# Allegro board HMC472A_PCB_Finish.brd
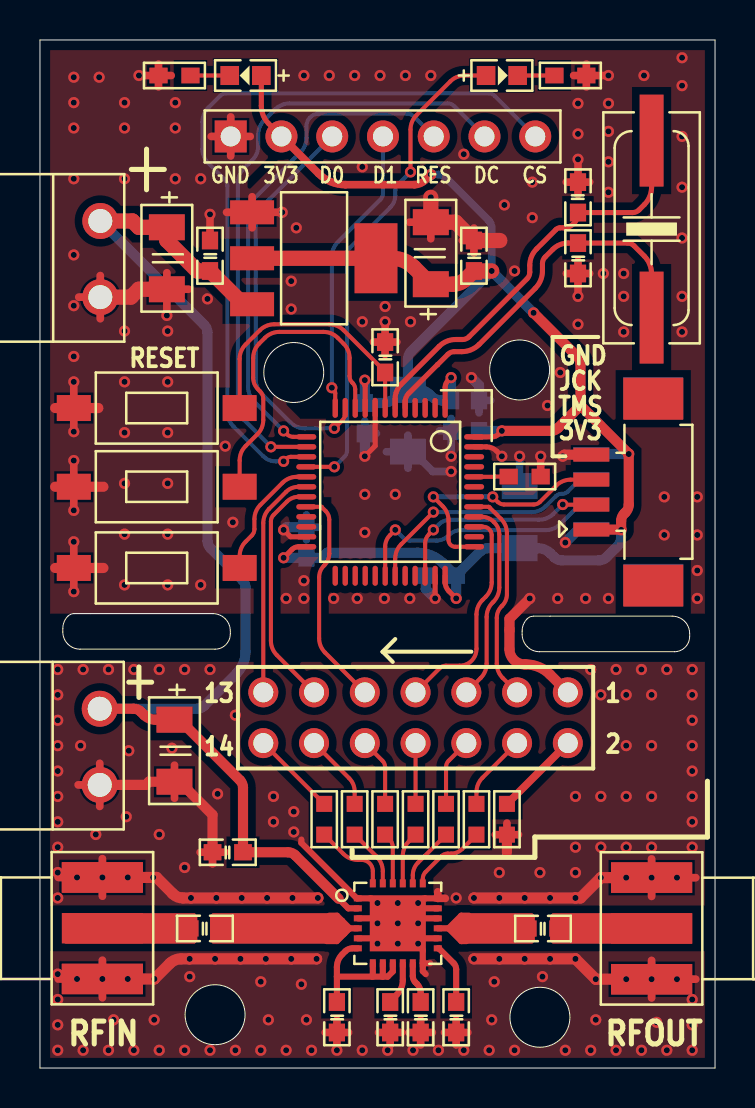
[diagram p0: board, top side]
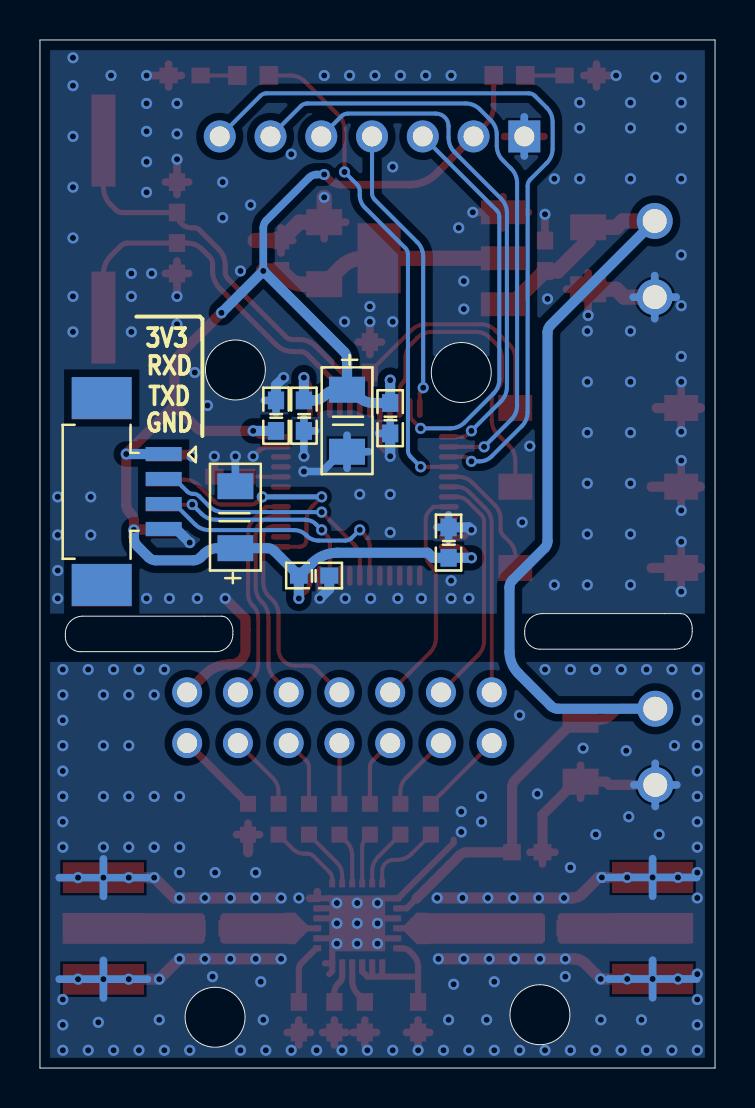
[diagram p1: board, bottom side, seen from below]

Outline 33.78 x 51.44 mm; copper layers: TOP, BOTTOM. Coordinates in mm from the lower left corner of the outline.
Outline path: circle c8.76,2.67 r1.5 ; circle c12.7,34.8 r1.5 ; circle c24,34.92 r1.5 ; circle c25.02,2.54 r1.5 ; 0,51.44 0,0 33.78,0 33.78,51.44 0,51.44 ; 1.14,21.99 arc(1.21,22.32) 1.4,22.61 arc(1.54,22.7) 1.7,22.73 8.66,22.73 arc(8.99,22.67) 9.27,22.48 arc(9.46,22.2) 9.53,21.87 9.53,21.72 arc(9.3,21.18) 8.76,20.95 2.01,20.95 arc(1.68,21.02) 1.4,21.21 arc(1.21,21.49) 1.14,21.82 1.14,21.99 ; 24.13,21.87 arc(24.2,22.2) 24.38,22.48 arc(24.52,22.57) 24.69,22.61 31.64,22.61 arc(31.98,22.54) 32.26,22.35 arc(32.45,22.07) 32.51,21.74 32.51,21.59 arc(32.29,21.05) 31.75,20.83 25,20.83 arc(24.67,20.89) 24.38,21.08 arc(24.2,21.36) 24.13,21.7 24.13,21.87

## Design rules (mm)
net group POWER_CLASS: nets 3V3 5V

## Placement (name value [footprint] x y rotation side)
BNC1  SMA  [BNC5_2R54_7R7_SM_V]  3.12 7 0 top
BNC2  SMA  [BNC5_2R54_7R7_SM_V]  30.61 6.99 180 top
C1  104  [C0603]  8.51 40.64 90 top
C2  104  [C0603]  21.72 40.64 90 top
C3  22uF  [TA3216]  6.35 40.51 270 top
C4  22uF  [TA3216]  19.56 40.77 90 top
C5  106  [TA3216]  6.73 15.88 270 top
C6  104  [C0603]  20.57 32.64 90 bottom
C7  104  [C0603]  17.27 35.56 90 top
C8  1000pF  [C0603]  9.4 10.79 0 top
C9  1uF  [TA3216]  18.41 32.38 270 bottom
C10  104  [C0603]  16.26 32.51 90 bottom
C11  1000pF  [C0603]  25.17 6.98 0 top
C12  1000pF  [C0603]  8.26 6.99 0 top
C13  22pf  [C0603]  26.92 43.56 270 top
C14  104  [C0603]  20.07 24.64 180 bottom
C15  104  [C0603]  13.34 26.29 90 bottom
C16  104  [C0603]  21.97 32.64 90 bottom
C17  10uF  [TA3216]  24 27.56 90 bottom
C18  330pF  [C0603]  20.83 2.54 90 top
C19  22pf  [C0603]  26.92 40.51 90 top
C20  330pF  [C0603]  14.86 2.54 90 top
C21  330pF  [C0603]  17.53 2.54 90 top
C22  330pF  [C0603]  19.05 2.54 90 top
D1  PWR  [LED0603]  10.29 49.66 180 top
D2  LED0  [LED0603]  23.11 49.66 0 top
FB1  200R  [L0603]  14.22 12.45 90 top
FB2  200R  [L0603]  15.75 12.45 90 top
FB3  200R  [L0603]  17.27 12.45 90 top
FB4  200R  [L0603]  18.8 12.45 90 top
FB5  200R  [L0603]  20.32 12.45 90 top
FB6  200R  [L0603]  21.84 12.45 90 top
FB7  200R  [L0603]  23.37 12.45 90 top
J1  JLINK Debug  [1_25_PWT_4P]  30.32 28.88 90 top
J2  CON2  [KF_2EDG_3_81X2]  4.22 44.72 270 top
J3  OLED  [SIP-7]  9.54 46.61 0 top
J4  USART1  [1_25_PWT_4P]  30.32 28.78 270 bottom
J5  CON2  [KF_2EDG_3_81X2]  4.19 20.32 270 top
J6  HEADER 7X2  [CON_2R54_2X7]  26.42 18.8 180 top
NOREF  -  []  0 0 0 top
NOREF#2  -  []  33.78 0 90 top
R1  510R  [R0603]  6.73 49.66 180 top
R2  510R  [R0603]  26.54 49.66 0 top
R3  10K  [R0603]  24.26 29.59 0 top
SW2  RESET  [BUTTON_2P_SMD]  5.84 33.02 0 top
SW3  DOWN  [BUTTON_2P_SMD]  5.84 29.08 0 top
SW4  UP  [BUTTON_2P_SMD]  5.84 25.02 0 top
U1  STM32F103C8T6  [LQFP-48]  17.53 28.83 270 top
U2  AMS1117-3V3  [SOT-223]  13.72 40.51 270 top
U3  HMC472A  [QFN-24]  17.91 7.24 0 top
Y1  8M  [CRY_HC_49U_SMD]  30.61 41.97 90 top

## Library data of the parts
BNC1 BNC2 = BNC
C1 C2 C6-C8 C10-C16 C18-C22 = CAP NP
C3-C5 C9 C17 = CAP POL
D1 D2 = LED
FB1-FB7 = FERRITE_BEAD
J1 J4 = 4 HEADER
J2 J5 = CON2
J3 = HEADER 7
J6 = HEADER 7X2
R1-R3 = R
SW2-SW4 = SW PUSHBUTTON
U1 = STM32F103C8T6_0
U2 = AMS1117-3V3_0
U3 = HMC472A_0
Y1 = CRYSTAL

## Footprints (pads in the part's own frame, mm; a bottom-side part is the same pattern mirrored in y, then rotated)
1_25_PWT_4P
  rect 2.1x3 smd: (-4.742,-0.369) (4.608,-0.369)
  rect 0.7x1.8 smd: 1(-1.94,2.731) 2(-0.694,2.731) 3(0.558,2.731) 4(1.808,2.731)
BNC5_2R54_7R7_SM_V
  rect 4.06x1.52 smd: 1(0,0) 2(0,2.54) 3(0,-2.54) 4(0,2.54) 5(0,-2.54)
BUTTON_2P_SMD
  rect 1.7x1.3 smd: 1(-4.15,0) 2(4.15,0)
C0603
  rect 0.889x0.813 smd: 1(-0.762,0) 2(0.762,0)
CON_2R54_2X7
  round 1.5 hole 1: 1(0,0) 2(0,2.54) 3(2.54,0) 4(2.54,2.54) 5(5.08,0) 6(5.08,2.54) 7(7.62,0) 8(7.62,2.54) 9(10.16,0) 10(10.16,2.54) 11(12.7,0) 12(12.7,2.54) 13(15.24,0) 14(15.24,2.54)
CRY_HC_49U_SMD
  rect 4.6x1.2 smd: 1(-4.428,0) 2(4.428,0)
KF_2EDG_3_81X2
  round 1.8 hole 1.2: 1(2.345,-1.2) 2(6.155,-1.2)
L0603
  rect 0.8x0.8 smd: 1(-0.77,0) 2(0.77,0)
LED0603
  rect 0.93x0.95 smd: 1(-0.79,0) 2(0.79,0)
LQFP-48
  oval 1x0.27 smd: 1(-4.2,2.75) 2(-4.2,2.25) 3(-4.2,1.75) 4(-4.2,1.25) 5(-4.2,0.75) 6(-4.2,0.25) 7(-4.2,-0.25) 8(-4.2,-0.75) 9(-4.2,-1.25) 10(-4.2,-1.75) 11(-4.2,-2.25) 12(-4.2,-2.75) 25(4.2,-2.75) 26(4.2,-2.25) 27(4.2,-1.75) 28(4.2,-1.25) 29(4.2,-0.75) 30(4.2,-0.25) 31(4.2,0.25) 32(4.2,0.75) 33(4.2,1.25) 34(4.2,1.75) 35(4.2,2.25) 36(4.2,2.75)
  oval 0.27x1 smd: 13(-2.75,-4.2) 14(-2.25,-4.2) 15(-1.75,-4.2) 16(-1.25,-4.2) 17(-0.75,-4.2) 18(-0.25,-4.2) 19(0.25,-4.2) 20(0.75,-4.2) 21(1.25,-4.2) 22(1.75,-4.2) 23(2.25,-4.2) 24(2.75,-4.2) 37(2.75,4.2) 38(2.25,4.2) 39(1.75,4.2) 40(1.25,4.2) 41(0.75,4.2) 42(0.25,4.2) 43(-0.25,4.2) 44(-0.75,4.2) 45(-1.25,4.2) 46(-1.75,4.2) 47(-2.25,4.2) 48(-2.75,4.2)
QFN-24
  rect 0.4x0.3 smd: 1(-2,1.25) 2(-2,0.75) 3(-2,0.25) 4(-2,-0.25) 5(-2,-0.75) 6(-2,-1.25) 13(2,-1.25) 14(2,-0.75) 15(2,-0.25) 16(2,0.25) 17(2,0.75) 18(2,1.25)
  rect 0.3x0.4 smd: 7(-1.25,-2) 8(-0.75,-2) 9(-0.25,-2) 10(0.25,-2) 11(0.75,-2) 12(1.25,-2) 19(1.25,2) 20(0.75,2) 21(0.25,2) 22(-0.25,2) 23(-0.75,2) 24(-1.25,2)
  rect 2.8x2.8 smd: 25(0,0)
R0603
  rect 0.914x0.787 smd: 1(-0.8,0) 2(0.8,0)
SIP-7
  rect 1.6x1.6 hole 1: 1(0,0)
  round 1.6 hole 1: 2(2.54,0) 3(5.08,0) 4(7.62,0) 5(10.16,0) 6(12.7,0) 7(15.24,0)
SOT-223
  rect 1.2x2.2 smd: 1(-2.3,-3.1) 2(0,-3.1) 3(2.3,-3.1)
  rect 3.5x2.15 smd: 4(0,3.1)
TA3216
  rect 1.3x1.8 smd: 1(-1.55,0) 2(1.55,0)

## Nets
3V3: C2.1 C4.1 C6.2 C9.1 C10.2 C14.1 C15.1 C16.1 C17.1 D1.1(CATHODE) J1.1 J3.2 J4.1 U1.1(VBAT) U1.9(VDDA) U1.24(VDD_1) U1.36(VDD_2) U1.48(VDD_3) U2.2(OUT0) U2.4(OUT1)
5V: C1.1 C3.1 C5.1 C8.2 J2.1 J5.1 U2.3(IN) U3.2(VDD)
AGND: BNC1.2(GND#2) BNC1.3(GND#3) BNC1.4(GND#4) BNC1.5(GND#5) BNC2.2(GND#2) BNC2.3(GND#3) BNC2.4(GND#4) BNC2.5(GND#5) C5.2 C8.1 C18.1 C20.1 C21.1 C22.1 FB7.1 J5.2 U3.1(NC0) U3.3(NC1) U3.5(NC2) U3.12(NC3) U3.14(NC4) U3.16(NC5) U3.17(NC6) U3.18(NC7) U3.25(GND)
GND: C1.2 C2.2 C3.2 C4.2 C6.1 C7.2 C9.2 C10.1 C13.1 C14.2 C15.2 C16.2 C17.2 C19.1 J1.4 J2.2 J3.1 J4.4 J6.1 R1.2 R2.2 R3.2 SW2.1 SW3.1 SW4.1 U1.8(VSSA) U1.23(VSS_1) U1.35(VSS_2) U1.47(VSS_3) U2.1(GND)
BOOT0: R3.1 U1.44(BOOT0)
CTR0: J6.3 U1.41(PB5)
CTR1: J6.5 U1.40(PB4)
CTR2: J6.7 U1.39(PB3)
CTR3: J6.9 U1.20(PB2/BOOT1)
CTR4: J6.11 U1.19(PB1)
CTR5: J6.13 U1.18(PB0)
KEY1: SW3.2 U1.10(PA0-WKUP)
KEY2: SW4.2 U1.17(PA7)
LED0: D2.1(CATHODE) U1.16(PA6)
NRST: C7.1 SW2.2 U1.7(NRST)
OLED_CS: J3.7 U1.15(PA5)
OLED_D0: J3.3 U1.11(PA1)
OLED_D1: J3.4 U1.12(PA2)
OLED_DC: J3.6 U1.14(PA4)
OLED_RES: J3.5 U1.13(PA3)
SWCLK: J1.3 U1.37(PA14/SWCLK)
SWIO: J1.2 U1.34(PA13/SWIO)
USART1_RXD: J4.2 U1.31(PA10/RXD)
USART1_TXD: J4.3 U1.30(PA9/TXD)
X1: C19.2 U1.5(PD0-OSC_IN) Y1.1
X2: C13.2 U1.6(PD1) Y1.2
N26655: D1.2(ANODE) R1.1
N34017: C12.2 U3.4(RF1)
N34061: BNC1.1 C12.1
N34081: C20.2 U3.6(ACG1) U3.7(AGC2) U3.8(AGC3) U3.9(AGC4)
N34141: C21.2 U3.10(AGC5)
N34189: C22.2 U3.11(AGC6)
N34237: C18.2 U3.13(AGC7)
N34253: C11.1 U3.15(RF2)
N34307: BNC2.1 C11.2
N34347: FB1.1 U3.24(V6)
N34451: FB2.1 U3.23(V5)
N34459: FB3.1 U3.22(V4)
N34467: FB4.1 U3.21(V3)
N34475: FB5.1 U3.20(V2)
N34483: FB6.1 U3.19(V1)
N34491: FB1.2 J6.14
N34527: FB2.2 J6.12
N34539: FB3.2 J6.10
N34543: FB4.2 J6.8
N34555: FB5.2 J6.6
N34567: FB6.2 J6.4
N37032: FB7.2 J6.2
N45168: D2.2(ANODE) R2.1

Pads without a net: U1 2 3 4 21 22 25 26 27 28 29 32 33 38 42 43 45 46

## Via types
v1: diameter 0.559, hole 0.305, TOP to BOTTOM, 286 vias

## Routing (per net, layer and track width the routed paths; a pad name or vN(x,y) marks a point on that pad's centre or on a via; arc(x,y) is an arc through that point)
3V3: length 98
  TOP w0.254: U1.1 20.28,34.06 arc(20.31,34.23) 20.41,34.38 v1(20.57,34.54) ; U1.36 20.28,24.31 arc(20.32,24.07) 20.46,23.86 v1(20.83,23.5) ; v1(23.11,31.88) 22.95,31.71 arc(22.8,31.61) 22.63,31.58 U1.48 ; D1.1 11.08,48.14 arc(11.17,47.66) 11.45,47.25 J3.2 ; v1(12.19,25.53) 12.61,25.94 arc(12.76,26.04) 12.93,26.08 U1.24 ; U1.9 16.28,34.14 16.26,34.16 v1(16.26,34.42)
  TOP w0.381: J3.2 13.94,44.75 arc(14.56,44.34) 15.29,44.2 18.73,44.2 arc(19.03,44.26) 19.28,44.42 v1(19.56,44.7)
  TOP w0.508: 27.05,33.15 29.46,30.73 v1(29.46,30.72) 29.46,28.18 arc(29.42,27.98) 29.31,27.81 29.24,27.74 arc(29.12,27.57) 29.08,27.37 v1(29.08,26.92) 29.07,26.94 J1.1 ; 27.05,33.15 27.05,35.22 arc(27.01,35.42) 26.9,35.58 v1(24.7,37.78) ; 27.05,33.15 25.93,32.03 arc(25.77,31.92) 25.57,31.88 v1(23.11,31.88)
  TOP w0.762: U2.2 U2.4 17.62,40.51 arc(18.21,40.39) 18.72,40.06 C4.1 20.66,39.22 arc(21.03,39.29) 21.33,39.49 C2.1 v1(22.61,39.88)
  BOTTOM w0.381: v1(22.61,39.88) 22.61,42.03 arc(22.57,42.24) 22.45,42.41 20.31,44.55 arc(20.14,44.66) 19.93,44.7 v1(19.56,44.7)
  BOTTOM w0.508: C14.1 20.79,24.64 20.18,25.25 arc(19.59,25.64) 18.89,25.78 14.38,25.78 14.12,25.53 C15.1 v1(12.19,25.53) ; C14.1 22.05,25.86 arc(22.21,25.97) 22.41,26.01 C17.1 24.9,26.01 arc(25.26,25.94) 25.55,25.74 25.74,25.55 arc(25.91,25.44) 26.1,25.4 27.98,25.4 arc(28.18,25.44) 28.34,25.55 28.89,26.1 arc(29.03,26.31) 29.08,26.56 v1(29.08,26.92) ; C14.1 v1(20.83,23.5) ; C9.1 18.93,33.94 arc(19.23,33.88) 19.48,33.7 19.56,33.63 arc(19.81,33.46) 20.11,33.4 C6.2 v1(20.57,34.54) ; C9.1 18.19,33.94 17.82,33.57 arc(17.49,33.35) 17.11,33.27 C10.2 v1(16.26,34.42) ; C9.1 18.41,35.48 arc(18.45,35.67) 18.56,35.84 v1(22.61,39.88) v1(24.7,37.78) ; 21.97,31.88 v1(23.11,31.88) ; J4.1 v1(29.46,30.72)
5V: length 61.9
  TOP w0.305: U3.2 15.43,7.99 14.95,8.47
  TOP w0.508: 14.95,8.47 12.77,10.65 arc(12.61,10.76) 12.41,10.79 C8.2 10.16,14.04 arc(10.12,14.23) 10.01,14.4 6.98,17.43 C5.1 5.79,17.43 arc(5.48,17.49) 5.21,17.66 5.05,17.83 arc(4.88,17.94) 4.69,17.98 J5.1
  TOP w0.762: J2.1 4.63,42.38 4.94,42.06 C3.1 6.35,41.4 7.87,39.88 C1.1 10.17,38.21 U2.3
  BOTTOM w0.508: J5.1 7.86,17.98 arc(8.05,18.01) 8.22,18.12 9.84,19.75 arc(10.17,20.24) 10.29,20.82 10.29,24.05 arc(10.25,24.24) 10.14,24.41 8.53,26.01 arc(8.42,26.18) 8.38,26.37 8.38,36.8 arc(8.34,37) 8.23,37.16 J2.1
AGND: length 135.6
  TOP w0.305: U3.16 18.16,7.49 ; 18.16,7.49 v1(17.91,7.24) ; 18.16,7.49 18.66,7.99 ; v1(17.91,7.24) 17.16,6.49 U3.5 ; v1(17.91,7.24) 17.66,7.49 ; v1(17.91,7.24) 18.66,6.49 ; 18.66,7.99 v1(18.92,8.26) 19.06,8.39 arc(19.17,8.46) 19.29,8.49 U3.18 ; 18.66,7.99 U3.17 ; 17.66,7.49 v1(16.89,8.26) 16.75,8.39 arc(16.65,8.46) 16.52,8.49 U3.1 15.86,8.49 13.08,11.26 13.08,11.43 ; 17.66,7.49 U3.3 ; 18.66,6.49 U3.14 ; 18.66,6.49 v1(18.92,6.22) 19.06,6.08 arc(19.13,5.98) 19.16,5.85 U3.12 ; U3.12 19.16,4.85 19.3,4.7 ; U3.12 19.53,5.24
  TOP w0.381: 14.86,1.16 C20.1 ; C20.1 15.44,1.78 ; C20.1 14.27,1.78 ; C20.1 14.86,2.4 ; 8.64,10.21 C8.1 ; C8.1 8.01,10.79 ; C8.1 9.26,10.79 ; v1(30.61,4.45) 32.81,4.45 ; v1(30.61,4.45) 30.61,5.38 ; v1(30.61,4.45) 30.61,3.51 ; 20.24,1.78 C18.1 ; C18.1 20.83,1.16 ; C18.1 21.41,1.78 ; C18.1 20.83,2.4 ; v1(30.61,9.53) 32.81,9.53 ; v1(30.61,9.53) 30.61,10.46 ; v1(30.61,9.53) 30.61,8.59 ; 18.47,1.78 C22.1 ; C22.1 19.05,2.4 ; C22.1 19.63,1.78 ; C22.1 19.05,1.16 ; 3.12,3.52 v1(3.12,4.46) ; v1(3.12,4.46) 3.12,5.39 ; v1(3.12,4.46) 0.92,4.46 ; 17.53,1.16 C21.1 ; C21.1 18.11,1.78 ; C21.1 17.53,2.4 ; C21.1 16.94,1.78 ; 0.92,9.54 v1(3.12,9.54) ; v1(3.12,9.54) 3.12,10.47 ; v1(3.12,9.54) 3.12,8.6 ; 2.99,13.09 J5.2 ; J5.2 1.91,14.17 ; J5.2 2.99,15.24 ; 20.28,8.49 U3.18 19.91,8.82 ; FB7.1 23.37,12.25 ; FB7.1 23.95,11.68 ; FB7.1 22.79,11.68 ; 6.73,13.5 C5.2 6.73,15.15
  TOP w0.508: C8.1 8.64,12.67 6.98,14.32 C5.2 5.45,14.32 5.29,14.17 J5.2 ; FB7.1 23.37,10.79
  TOP w0.559: v1(13.91,8.51) v1(12.64,8.51) v1(11.37,8.51) v1(10.1,8.51) v1(8.83,8.51) v1(7.56,8.51) 7.15,8.51 arc(6.88,8.56) 6.65,8.72 5.83,9.54 v1(5.66,9.54) v1(4.39,9.54) v1(3.12,9.54) ; v1(21.72,8.51) v1(22.99,8.51) v1(24.26,8.51) v1(25.53,8.51) v1(26.8,8.51) 27.05,8.51 v1(28.07,9.53) v1(29.34,9.53) v1(30.61,9.53) ; v1(21.72,5.46) v1(22.99,5.46) v1(24.26,5.46) v1(25.53,5.46) v1(26.8,5.46) v1(27.81,4.45) v1(29.34,4.45) v1(30.61,4.45) ; v1(13.84,5.46) v1(12.57,5.46) v1(11.3,5.46) v1(10.03,5.46) v1(8.76,5.46) v1(7.49,5.46) 7.06,5.46 arc(6.76,5.4) 6.5,5.23 v1(5.73,4.46) v1(4.39,4.46) v1(3.12,4.46)
  BOTTOM w0.381: 0.92,9.54 v1(3.12,9.54) ; v1(3.12,9.54) 5.33,9.54 ; v1(3.12,9.54) 3.12,10.47 ; v1(3.12,9.54) 3.12,8.6 ; v1(3.12,4.46) 3.12,5.39 ; v1(3.12,4.46) 5.33,4.46 ; v1(3.12,4.46) 0.92,4.46 ; v1(3.12,4.46) 3.12,3.52 ; J5.2 2.99,15.24 ; J5.2 1.91,14.17 ; J5.2 2.99,13.09 ; J5.2 4.07,14.17 ; v1(30.61,4.45) 30.61,5.38 ; v1(30.61,4.45) 28.4,4.45 ; v1(30.61,4.45) 30.61,3.51 ; v1(30.61,4.45) 32.81,4.45 ; 28.4,9.53 v1(30.61,9.53) ; v1(30.61,9.53) 32.81,9.53 ; v1(30.61,9.53) 30.61,10.46 ; v1(30.61,9.53) 30.61,8.59
  vias: v1(0.89,19.94) v1(0.89,18.67) v1(0.89,17.4) v1(0.89,16.13) v1(0.89,14.86) v1(0.89,13.59) v1(0.89,12.32) v1(0.89,11.05) v1(0.89,9.78) v1(0.89,8.51) v1(0.89,4.7) v1(0.89,3.43) v1(0.89,2.16) v1(0.89,0.89) v1(1.85,9.54) v1(1.85,4.46) v1(2.03,16.13) v1(2.16,19.94) v1(2.16,0.89) v1(2.79,11.68) v1(3.43,19.94) v1(3.43,0.89) v1(3.68,2.41) v1(4.32,12.57) v1(4.45,15.88) v1(4.7,19.94) v1(4.7,0.89) v1(5.71,2.41) v1(5.97,19.94) v1(5.97,11.68) v1(5.97,0.89) v1(6.6,16) v1(7.24,19.94) v1(7.24,10.03) v1(7.24,0.89) v1(7.49,4.57) v1(8.51,19.94) v1(8.51,0.89) v1(8.89,13.72) v1(9.78,17.65) v1(9.78,0.89) v1(11.05,4.32) v1(11.05,0.89) v1(11.43,2.41) v1(11.68,13.59) v1(11.68,12.32) v1(12.32,0.89) v1(12.7,12.83) v1(12.7,11.81) v1(13.08,4.19) v1(13.34,2.41) v1(13.59,0.89) v1(14.86,0.89) v1(16.13,0.89) v1(16.89,7.24) v1(16.89,6.22) v1(17.4,0.89) v1(17.91,8.26) v1(17.91,6.22) v1(18.67,0.89) v1(18.92,7.24) v1(19.94,0.89) v1(20.83,8.51) v1(21.21,0.89) v1(22.48,0.89) v1(22.61,2.41) v1(22.73,4.32) v1(22.99,9.78) v1(23.75,0.89) v1(25.02,9.78) v1(25.15,4.57) v1(26.29,0.89) v1(26.8,13.59) v1(26.8,11.05) v1(26.8,9.78) v1(27.56,19.94) v1(27.56,0.89) v1(27.81,2.41) v1(28.07,18.67) v1(28.07,13.59) v1(28.07,11.05) v1(28.83,19.94) v1(28.83,0.89) v1(29.34,18.67) v1(29.34,16.13) v1(29.34,13.59) v1(29.34,11.05) v1(30.1,19.94) v1(30.1,0.89) v1(30.61,18.67) v1(30.61,16.13) v1(30.61,13.59) v1(30.61,11.05) v1(30.86,2.29) v1(31.37,19.94) v1(31.37,0.89) v1(31.88,9.53) v1(31.88,4.45) v1(32.64,19.94) v1(32.64,18.67) v1(32.64,17.4) v1(32.64,16.13) v1(32.64,14.86) v1(32.64,13.59) v1(32.64,12.32) v1(32.64,11.05) v1(32.64,3.43) v1(32.64,2.16) v1(32.64,0.89)
GND: length 99.3
  TOP w0.254: U1.8 16.78,31.13 v1(16.26,30.61) ; v1(12.19,26.92) 12.54,26.58 U1.23 ; U1.47 22.33,31.08 arc(22.62,31.02) 22.86,30.86 v1(23.11,30.61) ; U1.35 v1(19.78,23.5)
  TOP w0.381: 26.34,39.75 C19.1 ; C19.1 v1(26.92,38.61) ; C19.1 27.51,39.75 ; C19.1 26.92,40.37 ; C13.1 27.51,44.32 ; C13.1 26.92,43.7 ; C13.1 26.34,44.32 ; C13.1 v1(26.92,45.47) ; v1(1.69,30.39) SW3.1 v1(1.69,27.9) ; J3.1 10.52,46.61 ; J3.1 9.54,45.63 ; J3.1 9.54,47.59 ; J3.1 8.57,46.61 ; 3.02,37.49 J2.2 ; J2.2 3.02,39.65 ; J2.2 1.94,38.57 ; 19.56,41.49 C4.2 18.48,42.32 ; R2.2 27.34,50.23 ; R2.2 27.34,49.09 ; R2.2 v1(28.45,49.66) ; R2.2 26.71,49.66 ; 21.13,41.4 C2.2 ; C2.2 21.72,40.78 ; C2.2 21.72,42.02 ; U2.1 10.62,43.59 ; U2.1 10.62,42.04 ; U2.1 v1(12.12,42.81) ; U2.1 9.34,42.81 ; C3.2 7.43,38.96 ; C3.2 6.35,39.79 ; C3.2 v1(6.35,37.65) ; R3.2 v1(25.06,30.61) ; R1.2 6.57,49.66 ; R1.2 v1(4.95,49.66) ; R1.2 5.93,49.09 ; R1.2 5.93,50.23 ; C7.2 17.86,36.32 ; C7.2 16.69,36.32 ; C7.2 v1(17.27,37.34) ; C7.2 17.27,35.7 ; v1(1.69,26.33) SW4.1 v1(1.69,23.84) ; v1(1.69,34.33) SW2.1 v1(1.69,31.84) ; C1.2 v1(8.51,42.71)
  TOP w0.508: 0.76,33.02 SW2.1 2.92,33.02 ; v1(26.16,30.61) 26.24,30.69 J1.4 ; 3.17,29.08 SW3.1 0.76,29.08 ; 3.17,25.02 SW4.1 0.76,25.02 ; v1(24.51,23.5) 23.5,22.48 23.5,21.98 23.5,21.87 23.5,20.96 arc(23.72,20.42) 24.26,20.19 24.31,20.19 arc(24.96,20.06) 25.52,19.69 J6.1
  TOP w0.762: v1(19.56,43.56) C4.2 20.8,42.32 C2.2 23.01,41.4 ; C3.2 4.94,38.96 4.55,38.57 J2.2
  BOTTOM w0.381: 13.34,26.43 C15.2 ; C15.2 13.92,27.05 ; C15.2 13.34,27.67 ; 20.57,31.88 20.57,32.5 ; 20.57,31.88 v1(20.57,30.61) ; 20.57,31.88 19.99,31.88 ; 3.02,37.49 J2.2 ; J2.2 1.94,38.57 ; J2.2 3.02,39.65 ; J2.2 4.1,38.57 ; C17.2 v1(24,30.61) ; 21.97,32.78 C16.2 22.56,33.4 ; 9.54,47.59 J3.1 9.54,45.63 ; 18.41,30.01 C9.2 ; C9.2 17.34,30.83 ; C9.2 18.41,31.66 ; C9.2 18.67,30.83 19.65,29.84 v1(20.57,29.84) ; 16.26,32.37 C10.1 16.84,31.75
  BOTTOM w0.508: v1(26.29,26.29) 26.97,26.97 J4.4 ; C15.2 12.32,27.05 v1(12.19,26.92) ; C16.2 21.97,34.16 v1(21.59,34.54) ; v1(19.78,23.5) 19.3,23.97 C14.2 ; C10.1 v1(16.26,30.61)
  vias: v1(1.69,49.57) v1(1.69,48.3) v1(1.69,47.03) v1(1.69,44.49) v1(1.69,40.68) v1(1.69,38.14) v1(1.69,35.6) v1(2.96,49.57) v1(4.23,48.3) v1(4.23,47.03) v1(4.23,44.49) v1(4.23,36.87) v1(4.23,34.33) v1(4.23,31.79) v1(4.23,29.25) v1(4.23,26.71) v1(4.23,24.17) v1(6.39,36.87) v1(6.39,34.33) v1(6.39,31.79) v1(6.39,29.25) v1(6.39,26.71) v1(6.39,24.17) v1(6.77,48.3) v1(6.77,47.03) v1(6.77,44.49) v1(8.04,44.49) v1(8.04,24.17) v1(8.38,38.48) v1(9.27,31.11) v1(9.65,27.3) v1(12.32,23.5) v1(12.57,39.37) v1(12.57,37.97) v1(12.83,42.04) v1(13.21,49.66) v1(13.21,24.38) v1(13.21,23.5) v1(14.48,49.66) v1(14.7,23.5) v1(15.75,49.66) v1(15.88,23.5) v1(16.13,45.09) v1(16.13,37.34) v1(16.26,28.7) v1(16.26,26.8) v1(17.02,49.66) v1(17.24,23.5) v1(17.27,38.1) v1(17.78,28.7) v1(18.29,49.66) v1(18.54,37.34) v1(18.51,23.5) v1(19.56,49.66) v1(21.21,45.72) v1(23.24,43.18) v1(23.75,39.88) v1(24.64,44.32) v1(24.64,42.55) v1(25.4,33.15) v1(25.91,23.5) v1(26.04,34.8) v1(26.92,48.26) v1(26.92,46.74) v1(26.92,37.21) v1(27.3,23.5) v1(28.19,39.75) v1(28.45,48.26) v1(28.45,46.86) v1(28.45,45.34) v1(28.45,43.81) v1(28.45,23.5) v1(29.21,39.75) v1(29.21,38.61) v1(29.21,36.83) v1(30.23,49.66) v1(31.24,28.57) v1(31.24,26.67) v1(32.13,50.55) v1(32.13,49.15) v1(32.13,46.61) v1(32.13,44.07) v1(32.13,41.53) v1(32.13,38.61) v1(32.13,36.83) v1(32.89,28.57) v1(32.89,26.67) v1(32.89,24.89) v1(32.89,23.5)
BOOT0: length 1.7
  TOP w0.203: U1.44 22.73,29.58 22.74,29.59 R3.1
CTR0: length 10.9
  TOP w0.203: U1.41 22.45,28.08 22.49,28.04 22.5,28.04 23.07,27.48 arc(23.29,27.15) 23.37,26.76 23.37,23.71 arc(23.31,23.39) 23.13,23.13 23.1,23.1 arc(22.92,22.83) 22.86,22.52 22.86,20.23 arc(22.94,19.84) 23.16,19.51 J6.3
CTR1: length 10.2
  TOP w0.203: J6.5 22.05,19.51 arc(22.27,19.84) 22.35,20.23 22.35,22.57 arc(22.43,22.95) 22.65,23.28 22.69,23.32 arc(22.91,23.65) 22.99,24.04 22.99,26.69 arc(22.92,27.02) 22.74,27.3 22.7,27.34 arc(22.43,27.52) 22.11,27.58 U1.40
CTR2: length 11.1
  TOP w0.203: J6.7 20,20 arc(20.14,20.1) 20.31,20.13 21.01,20.13 arc(21.6,20.37) 21.84,20.97 21.84,22.69 arc(21.92,23.08) 22.14,23.41 22.31,23.58 arc(22.53,23.91) 22.61,24.3 22.61,26.66 arc(22.48,26.96) 22.19,27.08 U1.39
CTR3: length 11.2
  TOP w0.203: U1.20 14.1,28.08 14.1,28.07 14.3,27.86 arc(14.43,27.67) 14.48,27.44 14.48,25.74 arc(14.42,25.43) 14.24,25.16 14.21,25.13 arc(14.03,24.87) 13.97,24.55 13.97,21.5 arc(14.05,21.11) 14.27,20.78 J6.9
CTR4: length 11.7
  TOP w0.203: J6.11 11.85,20.66 arc(11.63,20.99) 11.56,21.38 11.56,27.35 arc(11.59,27.52) 11.69,27.67 12.35,28.34 arc(12.62,28.52) 12.94,28.58 U1.19
CTR5: length 11.5
  TOP w0.203: U1.18 12.93,29.08 arc(12.6,29.01) 12.32,28.83 11.47,27.98 arc(11.25,27.65) 11.18,27.27 J6.13
KEY1: length 15.8
  TOP w0.203: SW3.2 9.99,30.4 arc(10.07,30.79) 10.29,31.12 10.88,31.71 arc(11.1,32.04) 11.18,32.42 11.18,33.48 arc(11.14,33.68) 11.02,33.85 10.91,33.96 arc(10.73,34.23) 10.67,34.54 10.67,35.52 arc(10.75,35.91) 10.97,36.24 11.26,36.53 arc(11.59,36.75) 11.98,36.83 14.18,36.83 arc(14.57,36.75) 14.9,36.53 15.2,36.24 arc(15.42,35.91) 15.49,35.52 15.49,34.6 arc(15.53,34.44) 15.62,34.3 15.65,34.27 arc(15.74,34.13) 15.78,33.96 U1.10
KEY2: length 6.3
  TOP w0.203: U1.17 12.85,29.58 arc(12.47,29.5) 12.14,29.28 11.03,28.17 arc(10.81,27.84) 10.73,27.46 10.73,26.96 arc(10.7,26.79) 10.6,26.64 10.29,26.33 arc(10.07,26) 9.99,25.61 SW4.2
LED0: length 24.8
  TOP w0.203: D2.1 21.25,49.66 arc(20.86,49.58) 20.53,49.36 18.84,47.67 arc(18.62,47.34) 18.54,46.95 v1(18.54,44.83) ; v1(14.73,30.08) U1.16
  BOTTOM w0.203: v1(18.54,44.83) 17.91,44.2 arc(17.81,44.05) 17.78,43.88 17.78,43.67 arc(17.71,43.33) 17.52,43.05 15.5,41.02 arc(15.4,40.88) 15.37,40.71 15.37,30.9 arc(15.33,30.73) 15.24,30.58 v1(14.73,30.08)
NRST: length 13.4
  TOP w0.203: SW2.2 9.99,35.48 arc(10.07,35.87) 10.29,36.2 11.01,36.91 arc(11.34,37.13) 11.72,37.21 14.48,37.21 arc(14.87,37.13) 15.19,36.91 17.27,34.84 C7.1 17.27,34.12 17.28,34.12 U1.7
OLED_CS: length 38.5
  TOP w0.203: U1.15 12.56,30.58 arc(12.43,30.55) 12.32,30.48 v1(12.19,30.35)
  BOTTOM w0.203: v1(12.19,30.35) 11.79,30.35 arc(11.46,30.42) 11.17,30.61 9.68,32.11 arc(9.46,32.44) 9.38,32.83 9.38,44.14 arc(9.34,44.31) 9.25,44.45 8.43,45.28 arc(8.21,45.61) 8.13,45.99 8.13,47.33 arc(8.21,47.72) 8.43,48.05 9.01,48.64 arc(9.16,48.73) 9.33,48.77 22.44,48.77 arc(22.61,48.73) 22.76,48.64 J3.7
OLED_D0: length 20.1
  TOP w0.203: v1(14.73,32) 15.12,32.39 arc(15.24,32.56) 15.28,32.77 U1.11
  BOTTOM w0.203: v1(14.73,32) 13.25,32 arc(12.86,32.08) 12.53,32.3 11.09,33.74 arc(10.87,34.07) 10.79,34.46 10.79,42.59 arc(10.83,42.76) 10.93,42.91 J3.3
OLED_D1: length 14.6
  TOP w0.203: v1(14.61,34.04) 14.7,33.94 arc(14.76,33.86) 14.78,33.76 U1.12
  BOTTOM w0.203: v1(14.61,34.04) 14.61,40.6 arc(14.68,40.99) 14.9,41.32 17.03,43.45 arc(17.13,43.6) 17.16,43.77 J3.4
OLED_DC: length 31.2
  TOP w0.203: v1(11.56,31.08) U1.14
  BOTTOM w0.203: v1(11.56,31.08) 10.2,32.43 arc(9.98,32.76) 9.91,33.15 9.91,44.28 arc(9.98,44.67) 10.2,45 10.62,45.42 arc(10.84,45.75) 10.92,46.14 10.92,46.7 arc(11,47.08) 11.22,47.41 11.77,47.96 arc(12.1,48.18) 12.49,48.26 20.41,48.26 arc(20.58,48.23) 20.72,48.13 J3.6
OLED_RES: length 25.5
  TOP w0.203: U1.13 12.68,31.58 arc(12.5,31.61) 12.36,31.71 v1(12.19,31.88)
  BOTTOM w0.203: v1(12.19,31.88) 10.71,33.36 arc(10.49,33.69) 10.41,34.08 10.41,42.78 arc(10.49,43.17) 10.71,43.5 13.04,45.82 arc(13.26,46.15) 13.34,46.54 13.34,47.12 arc(13.52,47.57) 13.97,47.75 18.38,47.75 arc(18.55,47.72) 18.69,47.62 J3.5
SWCLK: length 12.4
  TOP w0.203: v1(19.68,28.57) 20.15,28.11 arc(20.37,27.78) 20.45,27.39 20.45,26.42 arc(20.55,26.18) 20.78,26.08 U1.37 ; J1.3 26.56,29.44 arc(26.17,29.36) 25.84,29.14 25.02,28.32 arc(24.88,28.23) 24.71,28.19 23.22,28.19 arc(23.05,28.23) 22.91,28.32 v1(22.66,28.57)
  BOTTOM w0.254: v1(19.68,28.57) v1(22.66,28.57)
SWIO: length 10.8
  TOP w0.203: U1.34 19.28,26.25 arc(19.33,26.49) 19.47,26.71 v1(19.68,26.92) ; J1.2 26.17,28.19 v1(26.16,28.19)
  BOTTOM w0.203: v1(26.16,28.19) 25.7,27.73 arc(25.37,27.51) 24.98,27.43 20.53,27.43 arc(20.22,27.37) 19.95,27.19 v1(19.68,26.92)
USART1_RXD: length 12.4
  TOP w0.203: U1.31 17.78,25.48 arc(17.85,25.87) 18.07,26.2 v1(19.68,27.81)
  BOTTOM w0.203: J4.2 27.3,29.47 arc(27.06,29.43) 26.86,29.29 26.41,28.84 arc(26.28,28.76) 26.13,28.73 26.09,28.73 arc(25.95,28.7) 25.82,28.61 25.32,28.11 arc(24.99,27.89) 24.6,27.81 v1(19.68,27.81)
USART1_TXD: length 13.1
  TOP w0.203: U1.30 17.28,26.08 arc(17.34,26.39) 17.51,26.66 v1(17.78,26.92)
  BOTTOM w0.203: v1(17.78,26.92) 18.18,26.52 arc(18.33,26.42) 18.5,26.39 19.84,26.39 arc(20.17,26.45) 20.44,26.64 20.47,26.67 arc(20.74,26.85) 21.06,26.91 25.31,26.91 arc(25.7,26.99) 26.03,27.21 26.86,28.04 arc(27.06,28.17) 27.3,28.22 J4.3
X1: length 19.5
  TOP w0.254: U1.5 18.28,33.33 arc(18.32,33.56) 18.45,33.75 19.89,35.19 19.89,35.19 20.41,35.71 arc(20.56,35.81) 20.74,35.84 21.11,35.84 arc(21.58,35.93) 21.98,36.2 24.79,39.01 arc(25.05,39.41) 25.15,39.88 25.15,40.25 arc(25.18,40.43) 25.28,40.57 25.66,40.96 arc(26.01,41.19) 26.43,41.27 C19.2 29.4,41.27 arc(29.58,41.24) 29.72,41.14 30.24,40.63 arc(30.51,40.22) 30.61,39.73 Y1.1
X2: length 21
  TOP w0.254: U1.6 17.78,33.49 arc(17.85,33.87) 18.07,34.2 19.98,36.11 arc(20.36,36.36) 20.8,36.45 21.15,36.45 arc(21.32,36.48) 21.47,36.58 24.38,39.49 arc(24.48,39.64) 24.51,39.81 24.51,40.16 arc(24.6,40.6) 24.85,40.98 25.82,41.95 arc(25.92,42.01) 26.03,42.04 26.2,42.04 arc(26.71,42.25) 26.92,42.76 C13.2 29.66,42.8 arc(29.83,42.83) 29.98,42.93 30.24,43.2 arc(30.51,43.6) 30.61,44.07 Y1.2
N26655: length 2
  TOP w0.203: R1.1 D1.2
N34017: length 4.2
  TOP w0.305: U3.4 15.49,6.99 ; 15.49,6.99 15.12,6.99 ; 15.49,6.99 15.24,6.73 ; 15.49,6.99 15.12,7.37 ; 14.86,7.37 15.12,7.37 ; 15.12,7.37 14.86,7.62 14.48,7.62 ; 15.24,6.73 14.85,6.35 14.35,6.35 ; 15.24,6.73 14.73,6.73
N34081: length 8
  TOP w0.305: U3.9 17.66,4.83 17.4,4.57 17.14,4.57 ; U3.7 16.66,4.59 16.64,4.57 ; U3.6 15.64,5.99 arc(15.44,5.95) 15.28,5.84 15.12,5.68 arc(14.93,5.39) 14.86,5.05 14.86,4.57 ; 14.86,4.57 16.64,4.57 ; 14.86,4.57 C20.2 ; 17.14,4.57 16.64,4.57 ; 17.14,4.57 17.16,4.58 U3.8
N34141: length 2.2
  TOP w0.305: U3.10 18.16,4.39 arc(18.08,4) 17.86,3.68 17.53,3.34 C21.2
N34189: length 2.1
  TOP w0.305: U3.11 18.66,4.6 arc(18.69,4.43) 18.78,4.29 18.88,4.2 arc(19,4.01) 19.05,3.78 C22.2
N34237: length 3.1
  TOP w0.305: U3.13 19.96,5.99 20.7,5.24 arc(20.8,5.1) 20.83,4.94 C18.2
N34253: length 3.2
  TOP w0.305: 20.45,6.99 21.09,6.35 21.34,6.35 ; 20.45,6.99 21.08,7.62 21.46,7.62 ; 20.45,6.99 U3.15 ; 20.45,6.99 20.7,6.99
N34347: length 3.8
  TOP w0.203: FB1.1 15.19,10.71 arc(15.52,10.49) 15.91,10.41 16.09,10.41 arc(16.49,10.25) 16.66,9.85 U3.24
N34451: length 3
  TOP w0.203: U3.23 17.16,9.85 arc(17.08,10.24) 16.86,10.56 FB2.1
N34459: length 2.6
  TOP w0.203: FB3.1 17.48,11.47 arc(17.61,11.27) 17.66,11.04 U3.22
N34467: length 2.7
  TOP w0.203: U3.21 18.16,10.62 arc(18.23,11) 18.45,11.33 FB4.1
N34475: length 3.1
  TOP w0.203: U3.20 18.66,9.65 arc(18.72,9.99) 18.92,10.27 FB5.1
N34483: length 3.9
  TOP w0.203: U3.19 19.16,9.47 arc(19.19,9.65) 19.29,9.8 20.09,10.6 arc(20.23,10.69) 20.4,10.73 20.58,10.73 arc(20.87,10.79) 21.12,10.95 FB6.1
N34491: length 4.3
  TOP w0.203: FB1.2 13.66,13.78 13.65,13.78 J6.14
N34527: length 3.8
  TOP w0.203: FB2.2 15.75,13.84 arc(15.68,14.19) 15.47,14.5 J6.12
N34539: length 3.4
  TOP w0.203: FB3.2 17.27,15.05 arc(17.24,15.23) 17.14,15.37 J6.10
N34543: length 3
  TOP w0.203: FB4.2 J6.8
N34555: length 3.4
  TOP w0.203: FB5.2 20.32,15.05 arc(20.35,15.23) 20.45,15.37 J6.6
N34567: length 3.8
  TOP w0.203: FB6.2 21.84,13.8 arc(21.92,14.19) 22.14,14.52 J6.4
N37032: length 4.3
  TOP w0.381: FB7.2 23.38,13.22 J6.2
N45168: length 1.8
  TOP w0.203: D2.2 R2.1

## Copper pours and planes (outline as drawn; the poured copper is in the pictures)
AGND on TOP: 0.51,0.51 0.51,5.84 14.48,5.84 14.48,8.13 0.51,8.13 0.51,20.32 33.27,20.32 33.27,8.13 20.07,8.13 20.07,5.84 33.27,5.84 33.27,0.51 ; 2 cut-outs
AGND on BOTTOM: 0.51,0.51 0.51,20.32 33.27,20.32 33.27,0.51
GND on TOP: 0.51,22.73 0.51,50.93 33.27,50.93 33.27,22.73 ; 5 cut-outs
GND on BOTTOM: 0.51,22.73 0.51,50.93 33.27,50.93 33.27,22.73 ; 3 cut-outs
N34017 on TOP (solid shape): 15.33,7.03 15.33,6.94 14.61,6.22 8.64,6.22 8.51,6.35 8.51,7.62 8.64,7.75 14.61,7.75
N34061 on TOP (solid shape): 7.87,7.62 7.87,6.35 7.75,6.22 1.27,6.22 1.14,6.35 1.14,7.62 1.27,7.75 7.75,7.75
N34253 on TOP (solid shape): 24.77,7.62 24.77,6.35 24.64,6.22 21.21,6.22 20.49,6.94 20.49,7.03 21.21,7.75 24.64,7.75
N34307 on TOP (solid shape): 32.64,6.22 25.65,6.22 25.53,6.35 25.53,7.62 25.65,7.75 32.64,7.75

## Text on the board
Ref Des/Silkscreen Bottom: RXD | TXD | GND | 3V3
Ref Des/Silkscreen Top: GND | 3V3 | D0 | D1 | RES | DC | CS | RESET | JCK | TMS | RFIN | RFOUT
COMPVAL_TYPE_BOTTOM: FIGURE | SIZE | 12.0 | 39.37 | 47.24 | DRILL CHART: TOP to BOTTOM | ALL UNITS ARE IN MILS | PLATED | QTY | 286 | 20 | 1 | 4
